# Altium PCB PCB.PcbDoc
Units mm, origin at the board's own origin, x right, y up, seen from the top; angles counter-clockwise.
Board outline 50.5 x 64 mm, 2 copper layers (Top Layer, Bottom Layer); 24 components, 29 nets, 116 pads, 69 vias.
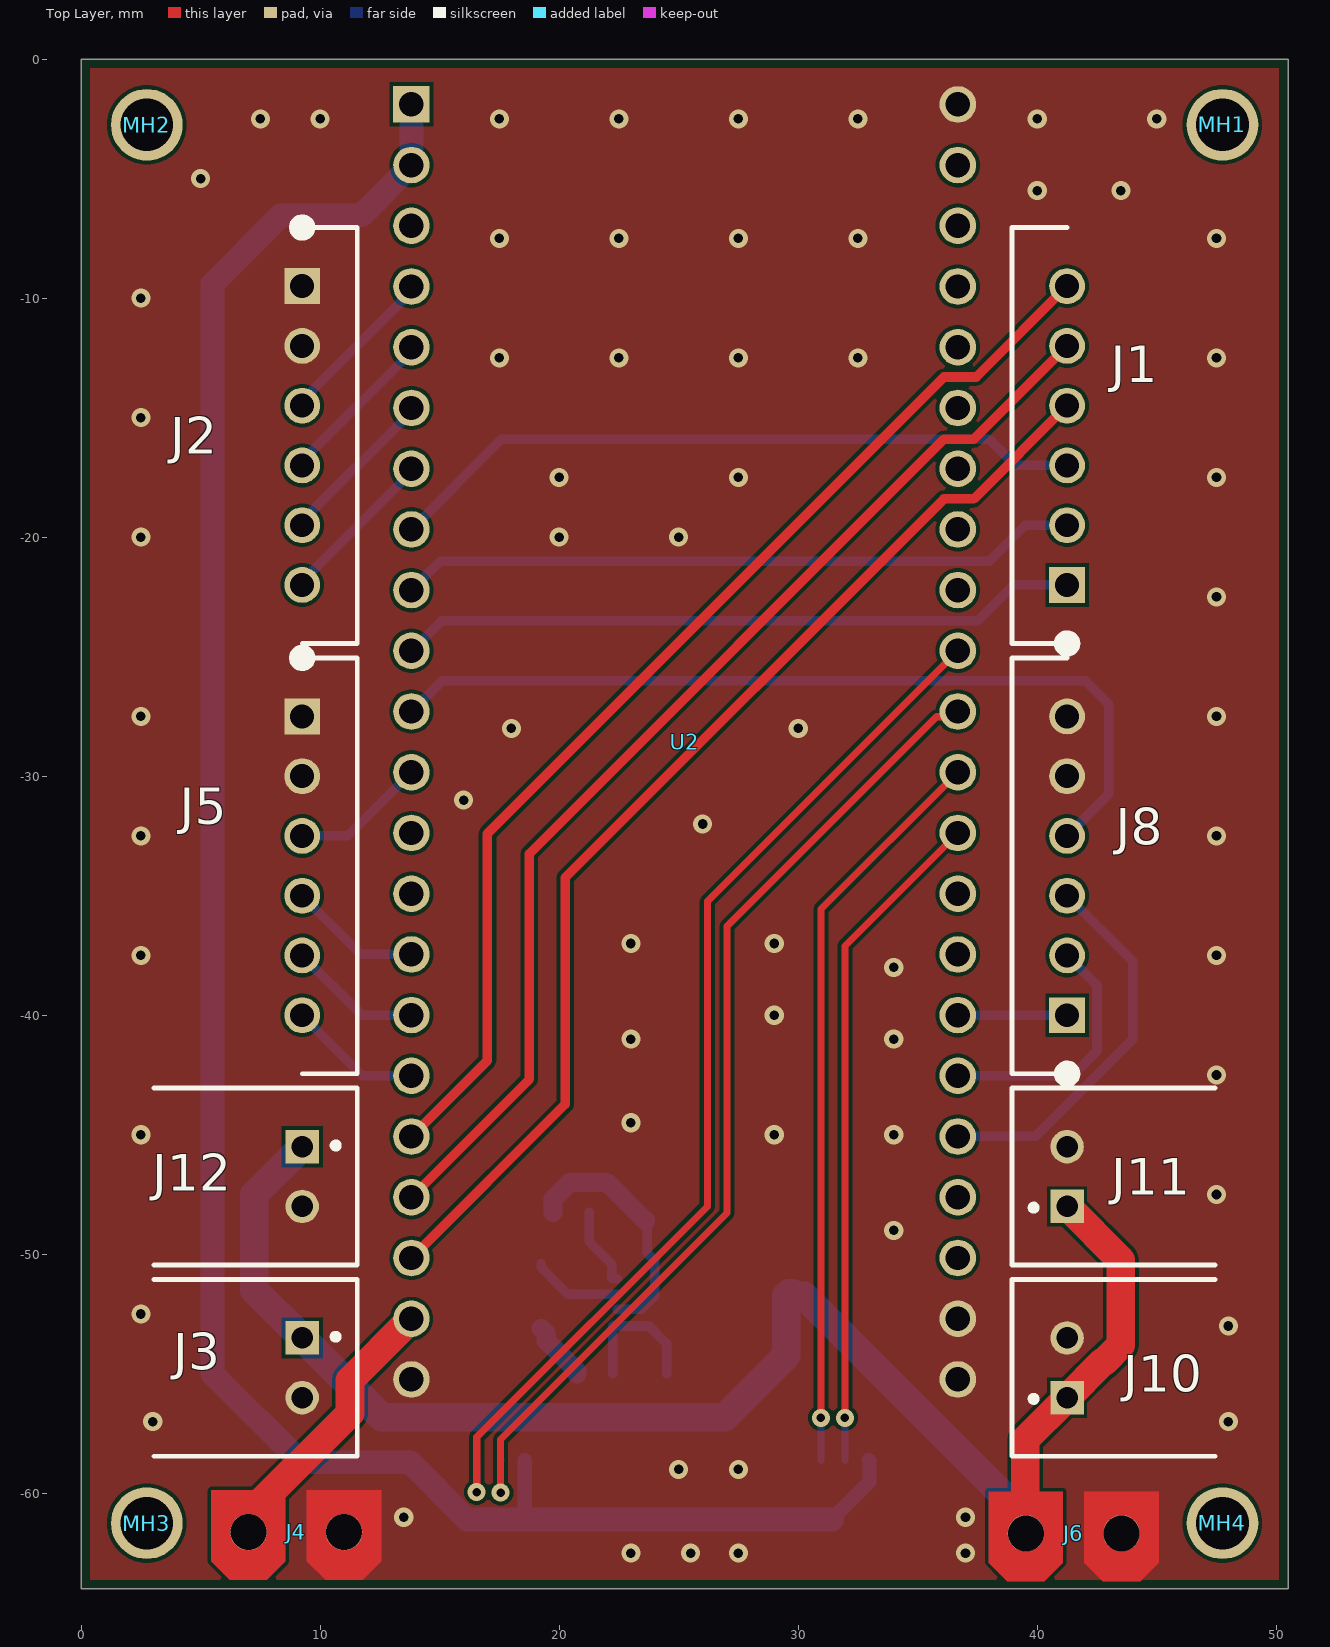
[diagram p0: Top Layer view]
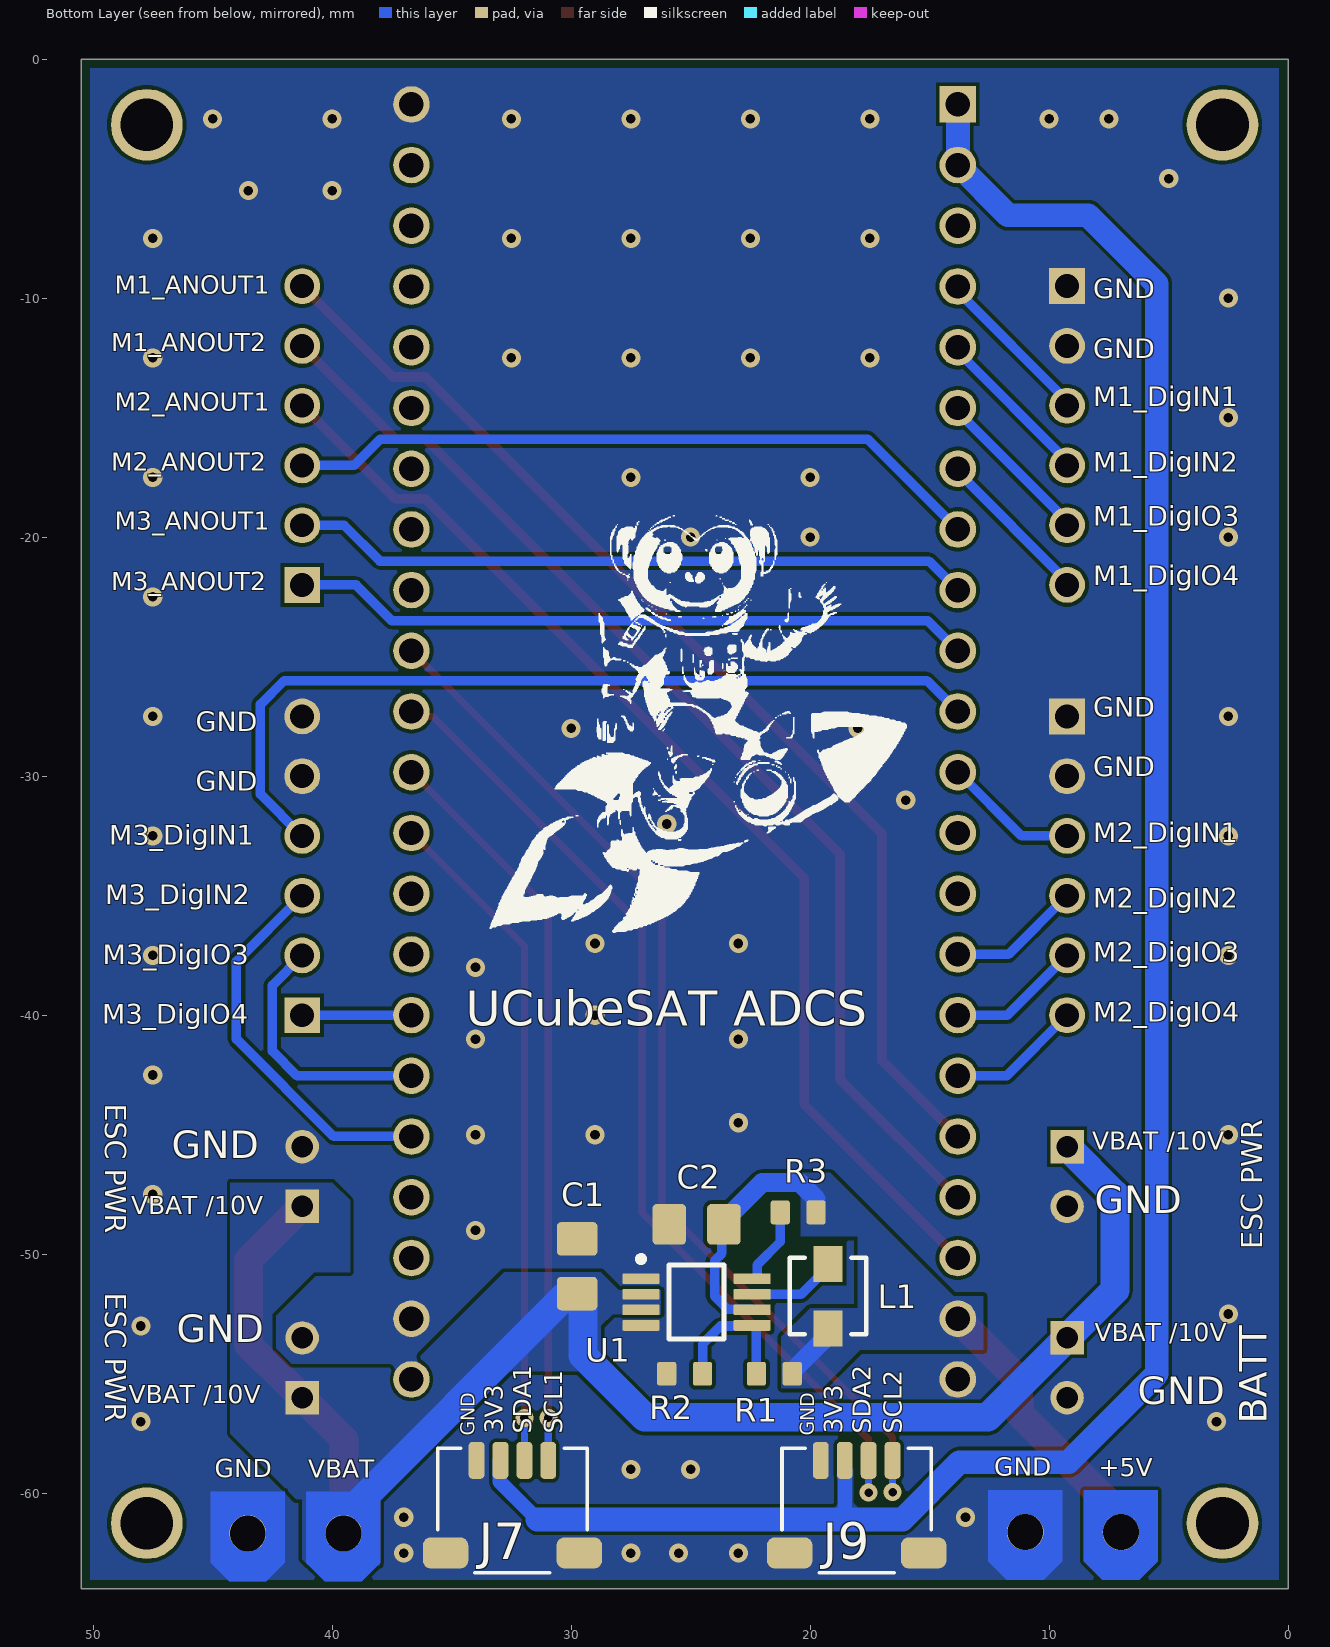
[diagram p1: Bottom Layer view, seen from below]
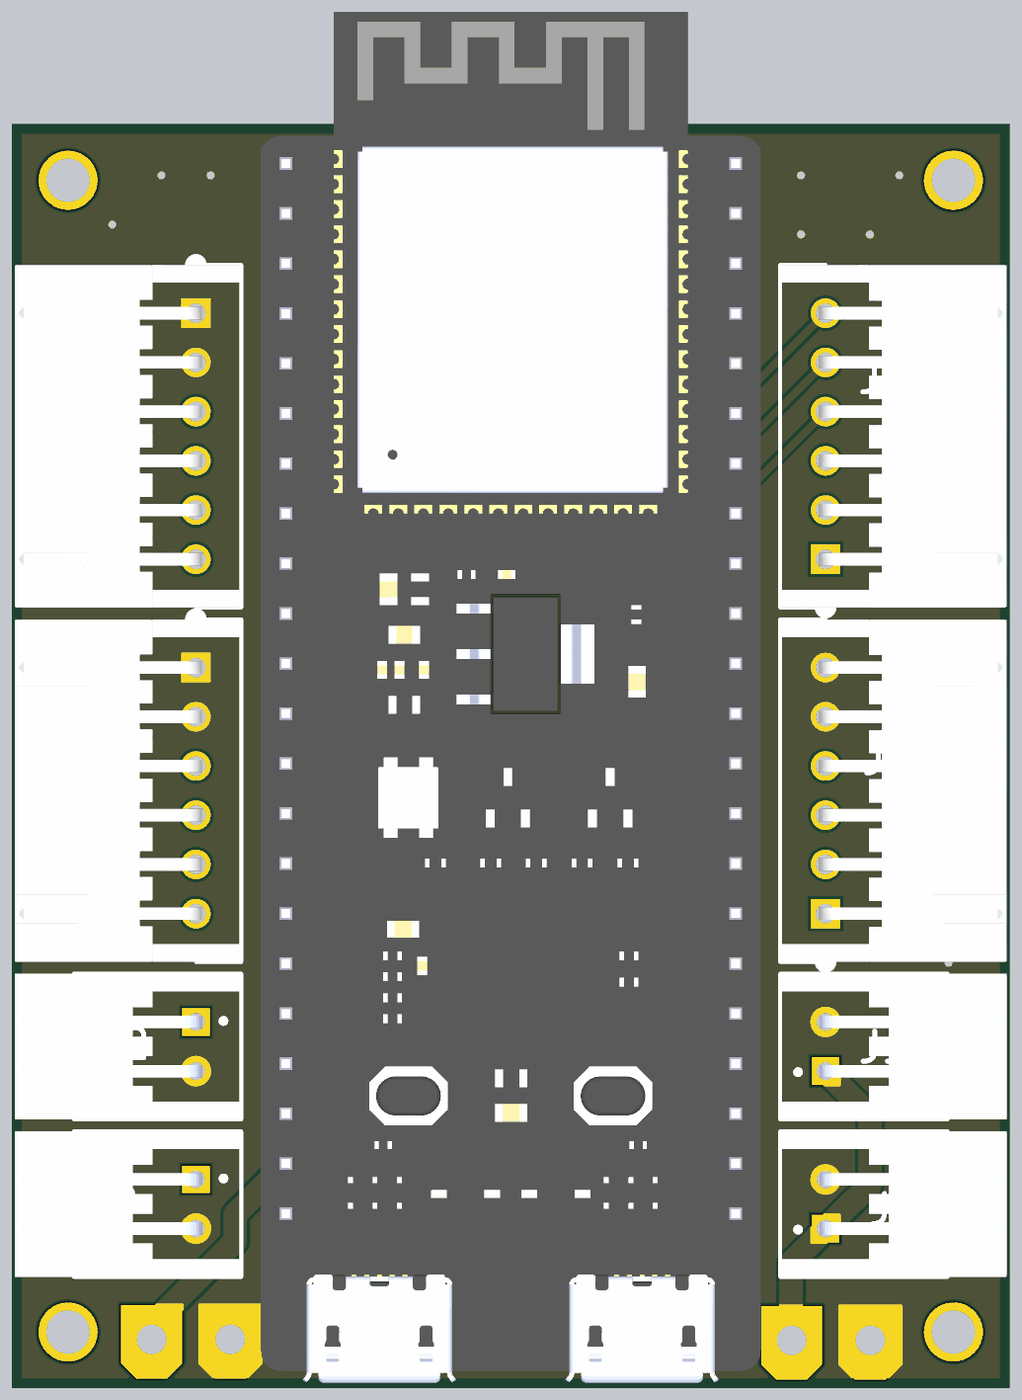
[diagram p2: 3D render of the assembled board from above, using the file's embedded part models]
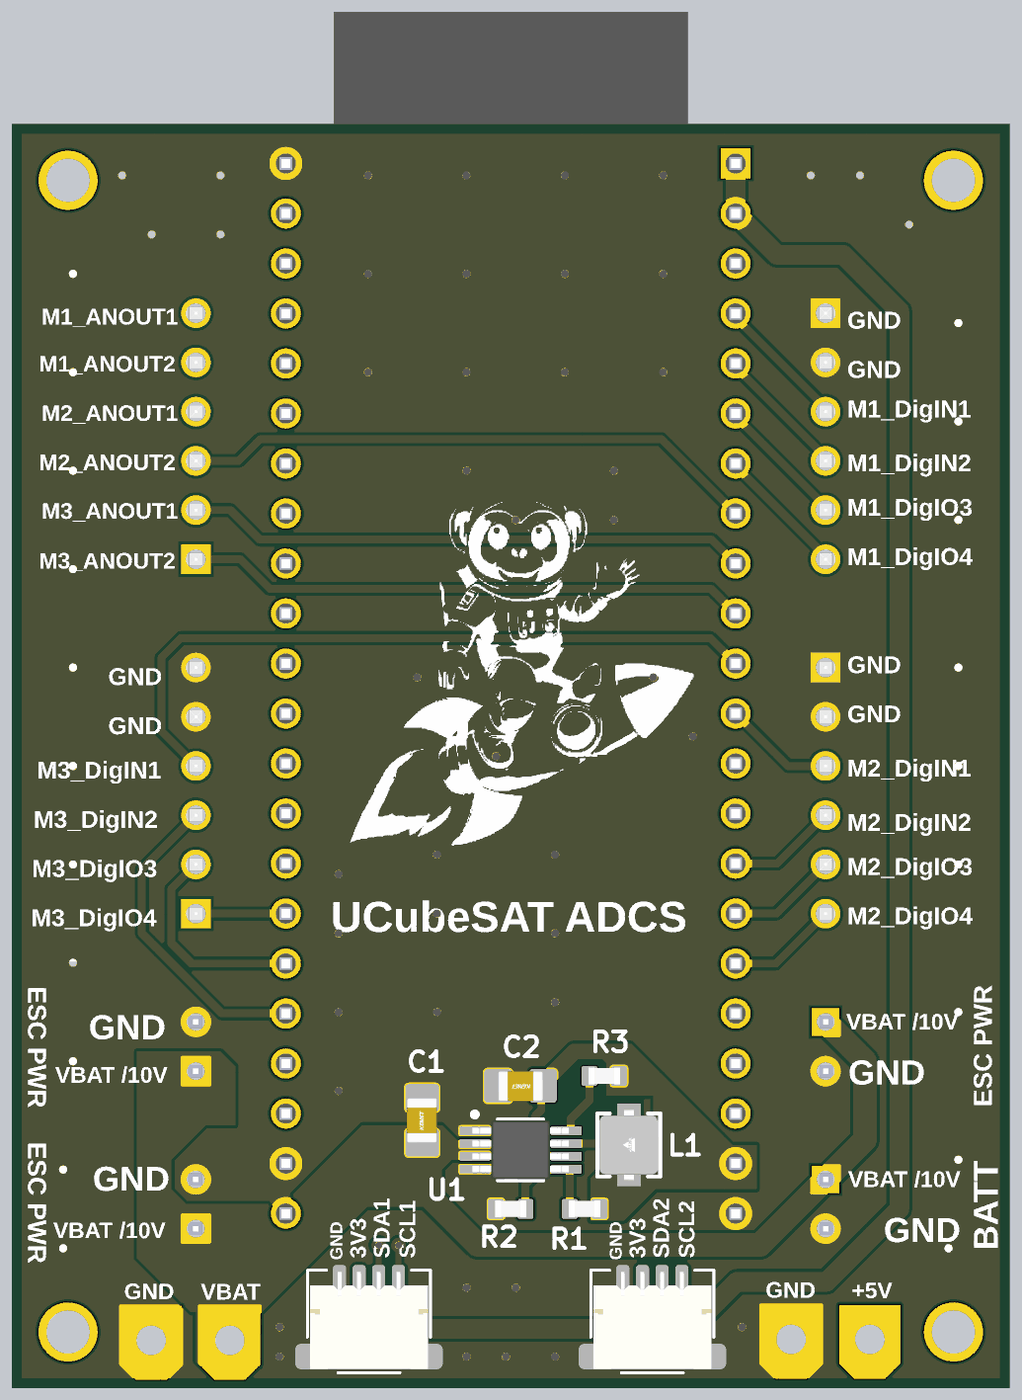
[diagram p3: 3D render of the assembled board from below, using the file's embedded part models]

## Layer stack, top to bottom
Top Solder: solder mask 0.0102, Solder Resist, Dk 3.5
Top Layer: signal copper 0.0356
Dielectric 1: dielectric 0.32, FR-4, Dk 4.8
Bottom Layer: signal copper 0.0356
Bottom Solder: solder mask 0.0102, Solder Resist, Dk 3.5

## Board outline
0,-64 0,0 50.5,0 50.5,-64

## Design rules (kind name [scope] priority, off if disabled: settings)
BoardOutlineClearance [All] p1: gap=0.381 ignorepadtopadclearanceinfootprint=FALSE
Clearance [All] p1: gap=0.152 ignorepadtopadclearanceinfootprint=FALSE
ComponentClearance [All] p1: gap=0.025 collisioncheckmode=3 verticalgap=0.025 showdistances=FALSE
DiffPairsRouting [All] p1: maxlimit=10 minlimit=0.152 mostfreqgap=0.203 toplayer_minwidth=0.152 toplayer_maxwidth=0.381 toplayer_prefwidth=0.203 bottomlayer_minwidth=0.152 bottomlayer_maxwidth=0.381 bottomlayer_prefwidth=0.203 maxuncoupledlength=12.7
HoleSize [All] p1: absolutevalues=TRUE maxlimit=6.731 minlimit=0.33 maxpercent=80.000 minpercent=20.000
HoleToHoleClearance [All] p1: gap=0.254 allowstackedmicrovias=FALSE
MinimumAnnularRing [All] p1: minimumring=0.178
MinimumSolderMaskSliver [All] p1: minsoldermaskwidth=0
PlaneClearance [All] p1: clearance=0.254
PlaneConnect [All] p1: planeconnectstyle=Direct reliefexpansion=0.406 reliefentries=4 reliefconductorwidth=0.152 reliefairgap=0.152
PolygonConnect [All] p1: connectstyle=Direct reliefconductorwidth=0.203 reliefentries=4 polygonreliefangle="90 Angle" airgapwidth=0.152
RoutingCorners [All] p1: cornerstyle=45-Degree minsetback=1.25 maxsetback=1.25
RoutingVias [All] p1: holewidth=0.381 width=0.762 viastyle="Through Hole" minholewidth=0.33 minwidth=0.686 maxholewidth=2.54 maxwidth=2.896
SilkToSilkClearance [All] p1: silktosilkclearance=0
SilkToSolderMaskClearance [IsPad] p1: minsilkscreentomaskgap=0.152 clearancetoexposedcopper=TRUE
SolderMaskExpansion [All] p1: expansion=0.075 istentingtop=FALSE
SupplyNets "Schematic Supply Nets_3" [InNet('+10V')] p1: voltage=0.000
SupplyNets "Schematic Supply Nets_2" [InNet('GND')] p2: voltage=0.000
SupplyNets "Schematic Supply Nets_1" [InNet('+5V')] p3: voltage=0.000
SupplyNets "Schematic Supply Nets" [InNet('+3V3')] p4: voltage=0.000
Width [All] p1: maxlimit=10.16 minlimit=0.152 preferedwidth=0.203
20 further rules are at their usual default settings.

## Components (designator, comment, footprint, x,y, rotation, side; value= is the part's Value field where it differs from the comment)
C1 "C2012X5R1E106K125AB" CAP_0805 29.75,-50.5 r90 bottom value=10uF
C2 "GRM21BR61E226ME44" CAP_0805 24.75,-48.75 r0 bottom value=22uF
J1 "S6B-XH-A (LF)(SN)" JST-XH-6PIN_RA 44.7,-15.75 r270 top locked
J2 "S6B-XH-A (LF)(SN)" JST-XH-6PIN_RA 5.8,-15.75 r90 top locked
J3 "S2B-XH-A" JST-S2B-XH-A(LF)(SN)_V 9.25,-54.75 r270 top locked
J4 "EXT_POWER_CONN" POWER 7,-61.625 r0 top
J5 "S6B-XH-A (LF)(SN)" JST-XH-6PIN_RA 5.8,-33.75 r90 top locked
J6 "EXT_POWER_CONN" POWER 39.525,-61.675 r0 top
J7 "SM04B-SRSS-TB" 4PIN_STEMMA 32.454,-60.719 r0 bottom locked
J8 "S6B-XH-A (LF)(SN)" JST-XH-6PIN_RA 44.7,-33.75 r270 top locked
J9 "SM04B-SRSS-TB" 4PIN_STEMMA 18.054,-60.719 r0 bottom locked
J10 "S2B-XH-A" JST-S2B-XH-A(LF)(SN)_V 41.25,-54.75 r90 top locked
J11 "S2B-XH-A" JST-S2B-XH-A(LF)(SN)_V 41.25,-46.75 r90 top locked
J12 "S2B-XH-A" JST-S2B-XH-A(LF)(SN)_V 9.25,-46.75 r270 top locked
L1 "IHLP1212BZEZ2R2M1Z" IND_1212 19.25,-51.75 r270 bottom
MH1 "MH" M2_MTH 47.75,-2.75 r0 top
MH2 "MH" M2_MTH 2.75,-2.75 r0 top locked
MH3 "MH" M2_MTH 2.75,-61.25 r0 top
MH4 "MH" M2_MTH 47.75,-61.25 r0 top
R1 "RES_0603" RES_0603 21.5,-55 r180 bottom
R2 "RES_0603" RES_0603 25.25,-55 r180 bottom
R3 "100k" RES_0603 20.5,-48.25 r180 bottom
U1 "TPS62160DGKR" DGK0008A_M 24.75,-52 r180 bottom
U2 "ESP32-S3-DEVKITC-1-N8R2" XCVR_ESP32-S3-DEVKITC-1-N8R2 25.25,-31.865 r0 top locked

## Footprints (in the part's own frame and the unit in brackets; to place one, negate y for a bottom-side part, rotate by r counter-clockwise, add the part's x,y. Pads: shape width x height; smd on the part's side, far side on the other; paste and mask are expansions set on the pad)
4PIN_STEMMA [mil]
  rrect50% 26x61 smd paste+0 mask+0: 1(59.06,-82.62) 2(19.68,-82.62) 3(-19.68,-82.62) 4(-59.06,-82.62)
  rrect50% 75x51 smd paste+0 mask+0: 5(-110.24,69.94) 6(110.24,69.94)
  silkscreen extent -123,-102 123,102, body extent -118,-100 118,95, height 117
CAP_0805 [mm]
  rrect25% 1.4x1.7 smd: 1(-1.143,0) 2(1.143,0)
  body extent -1.15,-0.76 1.15,0.79, height 1.01
DGK0008A_M [mm] "TSOP, 8-Leads, Body 3.1x3.1mm, Pitch 0.65mm, IPC Low Density"
  rrect22% 1.55x0.45 smd mask+0.06: 1(-2.325,0.975) 2(-2.325,0.325) 3(-2.325,-0.325) 4(-2.325,-0.975) 5(2.325,-0.975) 6(2.325,-0.325) 7(2.325,0.325) 8(2.325,0.975)
  silkscreen extent -2.45,-1.55 1.15,1.92, body extent -2.45,-1.5 2.45,1.5, height 0.94
IND_1212 [mm]
  rect 1.5x1.2 smd paste+0 mask+0: 1(-1.35,0) 2(1.35,0)
  silkscreen extent -1.6,-1.6 1.6,1.6, body extent -1.83,-1.5 1.83,1.5, height 2
JST-S2B-XH-A(LF)(SN)_V [mm] "Header, 2-Leads, Body 7.4x11.5mm, Pitch 2.5mm"
  rect 1.4x1.4 hole 0.9: 1(-1.25,0)
  round 1.4 hole 0.9: 2(1.25,0)
  silkscreen extent -3.7,-6.19 3.7,2.3, body extent -3.7,-9.21 3.7,2.29, height 5.71
JST-XH-6PIN_RA [mm]
  rect 1.5x1.5 hole 1 paste-2539.97 mask+0: 1(6.25,-3.45)
  round 1.5 hole 1 paste-2539.97 mask+0: 2(3.75,-3.45) 3(1.25,-3.45) 4(-1.25,-3.45) 5(-3.75,-3.45) 6(-6.25,-3.45)
  silkscreen extent -8.7,-5.75 9,-3.15, body extent -8.8,-5.85 8.8,5.85, height 0.25
M2_MTH [mm]
  round 3 hole 2.2 paste-2539.97: 1(0,0)
POWER [mm]
  round 1.525 hole 1.5 paste-2539.97: 1(0,0) 2(4,0)
  Top Layer region: -1.55,-1.225 -0.775,-2 0.775,-2 1.55,-1.225 1.55,1.75 -1.55,1.75
  Top Layer region: 2.45,-1.225 3.225,-2 4.775,-2 5.55,-1.225 5.55,1.75 2.45,1.75
  Bottom Layer region: -1.55,-1.225 -0.775,-2 0.775,-2 1.55,-1.225 1.55,1.75 -1.55,1.75
  Bottom Layer region: 2.45,-1.225 3.225,-2 4.775,-2 5.55,-1.225 5.55,1.75 2.45,1.75
RES_0603 [mm]
  rrect25% 0.8x1 smd: 1(-0.75,0) 2(0.75,0)
  body extent -0.8,-0.43 0.8,0.43, height 0.52
XCVR_ESP32-S3-DEVKITC-1-N8R2 [mm]
  rect 1.53x1.53 / inner round 1.53 / far side rect 1.53x1.53 hole 1.02: J1_1(-11.43,29.97)
  round 1.53 hole 1.02: J1_2(-11.43,27.43) J1_3(-11.43,24.89) J1_4(-11.43,22.35) J1_5(-11.43,19.81) J1_6(-11.43,17.27) J1_7(-11.43,14.73) J1_8(-11.43,12.19) J1_9(-11.43,9.65) J1_10(-11.43,7.11) J1_11(-11.43,4.57) J1_12(-11.43,2.03) J1_13(-11.43,-0.51) J1_14(-11.43,-3.05) J1_15(-11.43,-5.59) J1_16(-11.43,-8.13) J1_17(-11.43,-10.67) J1_18(-11.43,-13.21) J1_19(-11.43,-15.75) J1_20(-11.43,-18.29) J1_21(-11.43,-20.83) J1_22(-11.43,-23.37) J3_1(11.43,29.97) J3_2(11.43,27.43) J3_3(11.43,24.89) J3_4(11.43,22.35) J3_5(11.43,19.81) J3_6(11.43,17.27) J3_7(11.43,14.73) J3_8(11.43,12.19) J3_9(11.43,9.65) J3_10(11.43,7.11) J3_11(11.43,4.57) J3_12(11.43,2.03) J3_13(11.43,-0.51) J3_14(11.43,-3.05) J3_15(11.43,-5.59) J3_16(11.43,-8.13) J3_17(11.43,-10.67) J3_18(11.43,-13.21) J3_19(11.43,-15.75) J3_20(11.43,-18.29) J3_21(11.43,-20.83) J3_22(11.43,-23.37)
  body extent -12.7,-31.96 12.7,37.68, height 7.39

## Part data
C1: "CAP, CERM, 10uF, 25V, +/-10%, X5R, 0805", Cap_Case=0805, Manufacturer=TDK, Supplier Part Number 1=445-5984-1-ND, TempCo=X5R, Tolerance_%=10, Value1=Unknown, Value2=25V, ValueDisplayed=10µF, Cap_F=0.00001, ComponentLink1Description="Datasheet link", ComponentLink1URL=http://www.tdk.com/pdf/TDKMLCCCapRange.pdf, CompType=Capacitor, LatestRevisionDate=2014-06-25, MountType=SMT, PackageReference=0805, PartNumber=C2012X5R1E106K125AB, Polarized=N, Published=2008-06-19, Publisher="Texas Instruments", RoHS=Y, Supplier 1=Digi-Key, SymbolVersion=2008-07-09, TaMax_C=85, TaMin_C=-55, Technology=Ceramic, U/M=EA, VDC_V=25
C2: "CAP, CERM, 22 µF, 25 V, +/- 20%, X5R, 0805", Cap_Case=0805, Manufacturer=MuRata, Supplier Part Number 1=490-14661-1-ND, TempCo=X5R, Tolerance_%=20, ValueDisplayed=22µF, CompType=Capacitor, MountType=SMT, PackageReference=0805, PartNumber=GRM21BR61E226ME44, Supplier 1=DigiKey, TaMax_C=85
J1 J2 J5 J8: "CONN HEADER THT R/A 6POS 2.5MM", Color=Natural, Contact Resistance=20mR, Current Rating=3A, Flammability Rating="UL94 V-0", Housing Color=White, Insulation Resistance=1GR, Max Operating Temperature=85°C, Max Voltage Rating (AC)=250V, Min Operating Temperature=-25°C, Package Quantity=500, Connector Type=Header, Contact Finish - Mating=TIN, Contact Material=Brass, Contact Plating=Tin, Contact Shape=Square, Contact Type="Male Pin", Depth=11.5mm, Fastening Type=Detent, Gender=Male, Housing Material=Polyamide, Insulation Color=Natural, Insulation Material=Nylon, Lead Free="Lead Free", Lead Pitch=2.5mm, Length=17.4mm, Max Current Rating=3A, Mount="Through Hole", Number of Contacts=6, Number of Positions=6, Number of Rows=1, Orientation="Right Angle", Packaging=Bulk, Pitch=2.5mm, REACH SVHC="No SVHC", Series=XH, Termination=Solder, Voltage Rating=250V, Voltage Rating (AC)=250V, Wire/Cable Gauge=22AWG
MH1 MH2 MH3 MH4: library part M2_MTH
R1: Supplier Part Number 1=2019-RN73H1JTTD9423D25CT-ND, R=942k, Supplier 1=DigiKey
R2: Supplier Part Number 1=RC0603FR-07180KL, R=180k, Supplier 1=Avnet
R3: library part RES_0603, Supplier Part Number 1=311-100KHRTR-ND, Supplier 1=DigiKey
U1: "Buck Step Down Regulator with 3 to 17 V Input and 0.9 to 6 V Output, -40 to 85 degC, 8-Pin VSSOP (DGK), Green (RoHS & no Sb/Br)", Manufacturer="Texas Instruments", Rating=Catalog, Switch Current Limit(Typ)(A)=1.8, Code_JEDEC=MO-187-AA, ComponentLink1Description=Datasheet, ComponentLink1URL=http://www.ti.com/general/docs/lit/getliterature.tsp?genericPartNumber=TPS62160&fileType=pdf, ComponentLink2Description="Package Specification", ComponentLink2URL=http://www.ti.com/lit/ml/mpds028d/mpds028d.pdf, ComponentLink3Description="URL Link1", ComponentLink3URL="Samples URL:http://www.ti.com/product/tps62160#samples", DatasheetVersion=SLVSAM2A, Duty Cycle(Max)(%)=100, Eco-Plan="Green (RoHS & no Sb/Br)", Iout(Max)(A)=1, Iq(Typ)(mA)=0.017, Mounting Technology="Surface Mount", PackageDescription="8-Pin Thin Small Outline Package 3 x 3 mm Body ,0.65 mm Pitch", PackageReference=DGK0008A, PackageVersion="revE, May-2006", PartNumber=TPS62160DGKR, Regulated Outputs(#)=1, SubFamily="Step-Down Regulator", Synchronous Rectification=TRUE, Topology=Buck, Vin(Max)(V)=17, Vin(Min)(V)=3, Vout(Max)(V)=6, Vout(Min)(V)=0.9
U2: "WiFi Development Tools - 802.11 (Engineering Samples Only) ESP32-S3 General-Purpose Development Board, ESP32-S3-WROOM-1-N8R2, with Pin Header", Package=None, Check_prices=https://www.snapeda.com/parts/ESP32-S3-DEVKITC-1-N8R2/Espressif+Systems/view-part/?ref=eda, MF="Espressif Systems", MP=ESP32-S3-DEVKITC-1-N8R2, SnapEDA_Link=https://www.snapeda.com/parts/ESP32-S3-DEVKITC-1-N8R2/Espressif+Systems/view-part/?ref=snap

## Via types
v1: diameter 0.8, hole 0.4, Top Layer to Bottom Layer, tented both sides, 65 vias
v2: diameter 0.75, hole 0.356, Top Layer to Bottom Layer, tented both sides, 4 vias

## Nets (pads, with @x,y where several pads share a name; then routed paths per layer and width w, separated by ;. In a path a pad name is that pad's centre, name@x,y a point inside that pad or via, vN(x,y) a via of type N, cw(c..) or ccw(c..) an arc to the next point about the centre after c; other vN are vias at no path point)
+3V3: J7.2 J9.2 U2.J1_1 U2.J1_2 | length 92.6
  Bottom Layer w0.6: 18.5,-61.088 18.554,-61.034 J9.2 ; 31.412,-61.088 32.984,-59.516 32.984,-58.651 J7.2
  Bottom Layer w1: U2.J1_1 U2.J1_2 11.722,-6.533 8.367,-6.533 5.5,-9.4 5.5,-55 9.2,-58.7 13.753,-58.7 16.142,-61.088 18.5,-61.088 31.412,-61.088
+5V: C2.1 J4.1 L1.2 R1.2 R3.2 U1.6 U2.J1_21 | length 24.8
  Top Layer w1.2: J4.1 7,-60.9 11.25,-56.65 11.25,-55.265 U2.J1_21
  Bottom Layer w0.4: U1.6 22.45,-52.3 23.45,-52.3 24,-51.75 24,-50.272 23.694,-49.966 23.694,-48.687 C2.1@23.607,-48.6
  Bottom Layer w0.8: L1.2 19.45,-53.3 19.45,-53.6 20.75,-54.9 R1.2 ; R3.2 19.75,-47.692 20.442,-47 22.007,-47 C2.1@23.607,-48.6
+10V: C1.1 J3.1 J6.1 J10.1 J11.1 J12.1 U1.2 U1.3 | length 65.8
  Top Layer w1.2: J6.1 39.5,-61.65 39.5,-57.75 J10.1 42.75,-54.5 42.797,-54.5 43.5,-53.797 43.5,-50.25 J11.1
  Bottom Layer w1.2: J12.1 7.25,-47.5 7.25,-51.5 J3.1 12.575,-56.825 26.925,-56.825 29.5,-54.25 29.5,-51.743 29.6,-51.643 C1.1 29.85,-51.743 30.243,-51.743 39.5,-61 39.5,-61.65 J6.1
FB: R1.1 R2.2 U1.5 | length 5.8
  Bottom Layer w0.4: R1.1 22.25,-53 22.275,-52.975 U1.5 22.45,-53 23.75,-53 24.5,-53.75 R2.2
GND: C1.2 C2.2 J2.1 J2.2 J3.2 J4.2 J5.1 J5.2 J6.2 J7.1 J7.5 J7.6 J8.5 J8.6 J9.1 J9.5 J9.6 J10.2 J11.2 J12.2 R2.1 U1.1 U1.4 U2.J1_22 U2.J3_1 U2.J3_21 U2.J3_22
  other v1: 23,-62.5 25.5,-62.5 27.5,-62.5 37,-62.5 13.5,-61 37,-61 25,-59 27.5,-59 3,-57 48,-57 48,-53 2.5,-52.5 34,-49 47.5,-47.5 2.5,-45 29,-45 34,-45 23,-44.5 47.5,-42.5 23,-41 34,-41 29,-40 34,-38 2.5,-37.5 47.5,-37.5 23,-37 29,-37 2.5,-32.5 47.5,-32.5 26,-32 16,-31 18,-28 30,-28 2.5,-27.5 47.5,-27.5 47.5,-22.5 2.5,-20 20,-20 25,-20 20,-17.5 27.5,-17.5 47.5,-17.5 2.5,-15 17.5,-12.5 22.5,-12.5 27.5,-12.5 32.5,-12.5 47.5,-12.5 2.5,-10 17.5,-7.5 22.5,-7.5 27.5,-7.5 32.5,-7.5 47.5,-7.5 40,-5.5 43.5,-5.5 5,-5 7.5,-2.5 10,-2.5 17.5,-2.5 22.5,-2.5 27.5,-2.5 32.5,-2.5 40,-2.5 45,-2.5
M1_ANOUT1: J1.6 U2.J1_18 | length 47.7
  Top Layer w0.4: U2.J1_18 17,-41.895 17,-32.4 36.1,-13.3 37.45,-13.3 J1.6
M1_ANOUT2: J1.5 U2.J1_19 | length 47.7
  Top Layer w0.4: U2.J1_19 18.75,-42.685 18.75,-33.25 36.1,-15.9 37.35,-15.9 J1.5
M1_DigIN1: J2.3 U2.J1_4 | length 6.9
  Bottom Layer w0.4: J2.3 9.25,-14.292 13.82,-9.722 U2.J1_4
M1_DigIN2: J2.4 U2.J1_5 | length 6.8
  Bottom Layer w0.4: J2.4 9.25,-16.813 13.82,-12.243 U2.J1_5
M1_DigIO3: J2.5 U2.J1_6 | length 6.8
  Bottom Layer w0.4: J2.5 9.25,-19.332 13.82,-14.762 U2.J1_6
M1_DigIO4: J2.6 U2.J1_7 | length 6.8
  Bottom Layer w0.4: J2.6 9.25,-21.852 13.82,-17.282 U2.J1_7
M2_ANOUT1: J1.4 U2.J1_20 | length 47.7
  Top Layer w0.4: U2.J1_20 20.25,-43.725 20.25,-34.25 36.1,-18.4 37.35,-18.4 J1.4
M2_ANOUT2: J1.3 U2.J1_8 | length 29.4
  Bottom Layer w0.4: U2.J1_8 17.595,-15.9 37.982,-15.9 39.082,-17 J1.3
M2_DigIN1: J5.3 U2.J1_12 | length 5.7
  Bottom Layer w0.4: J5.3 11.155,-32.5 U2.J1_12
M2_DigIN2: J5.4 U2.J1_15 | length 5.6
  Bottom Layer w0.4: J5.4 11.705,-37.455 U2.J1_15
M2_DigIO3: J5.5 U2.J1_16 | length 5.6
  Bottom Layer w0.4: J5.5 11.745,-39.995 U2.J1_16
M2_DigIO4: J5.6 U2.J1_17 | length 5.6
  Bottom Layer w0.4: J5.6 11.785,-42.535 U2.J1_17
M3_ANOUT1: J1.2 U2.J1_9 | length 28.6
  Bottom Layer w0.4: U2.J1_9 15.035,-21 38,-21 39.5,-19.5 J1.2
M3_ANOUT2: J1.1 U2.J1_10 | length 28.6
  Bottom Layer w0.4: U2.J1_10 15.075,-23.5 37.5,-23.5 39,-22 J1.1
M3_DigIN1: J8.4 U2.J1_11 | length 36.4
  Bottom Layer w0.4: U2.J1_11 15.115,-26 42,-26 43,-27 43,-30.75 J8.4
M3_DigIN2: J8.3 U2.J3_18 | length 16.1
  Bottom Layer w0.4: U2.J3_18 36.688,-45.067 39.933,-45.067 44,-41 44,-37.75 J8.3
M3_DigIO3: J8.2 U2.J3_17 | length 10.8
  Bottom Layer w0.4: U2.J3_17 41.465,-42.535 42.5,-41.5 42.5,-38.75 J8.2
M3_DigIO4: J8.1 U2.J3_16 | length 4.6
  Bottom Layer w0.4: U2.J3_16 41.245,-39.995 J8.1
PG: R3.1 U1.8 | length 3.4
  Bottom Layer w0.4: R3.1 21.25,-49.475 22.209,-50.434 22.209,-51 22.234,-51.025 U1.8
SCL_1: J7.4 U2.J3_12 | length 31.2
  Top Layer w0.3: v2(30.954,-56.846) 30.954,-35.561 U2.J3_12
  Bottom Layer w0.3: J7.4 v2(30.954,-56.846)
SCL_2: J9.4 U2.J3_10 | length 44.9
  Top Layer w0.3: v2(16.55,-59.95) 16.55,-57.65 26.2,-48 26.2,-35.235 U2.J3_10
  Bottom Layer w0.3: v2(16.55,-59.95) 16.552,-59.948 J9.4 J9.4
SDA_1: J7.3 U2.J3_13 | length 28.2
  Top Layer w0.3: v2(31.954,-56.846) 31.954,-37.101 U2.J3_13
  Bottom Layer w0.3: J7.3 v2(31.954,-56.846)
SDA_2: J9.3 U2.J3_11 | length 42.4
  Top Layer w0.3: v2(17.55,-59.975) 17.55,-57.75 27.02,-48.28 27.02,-36.28 35.783,-27.517 36.458,-27.517 U2.J3_11
  Bottom Layer w0.3: v2(17.55,-59.975) 17.552,-59.973 17.552,-58.623 J9.3
SW: L1.1 U1.7 | length 3.8
  Bottom Layer w0.4: L1.1 19.25,-50.55 20.375,-51.675 U1.7
pads on no net: MH1.1 MH2.1 MH3.1 MH4.1 U2.J1_3 U2.J1_13 U2.J1_14 U2.J3_2 U2.J3_3 U2.J3_4 U2.J3_5 U2.J3_6 U2.J3_7 U2.J3_8 U2.J3_9 U2.J3_14 U2.J3_15 U2.J3_19 U2.J3_20

## Polygon pours and split planes (outlines as drawn)
GND on Bottom Layer "GND_L02_P003" (solid, remove dead copper, pour order 3): 50.5,0 0,0 0,-64 50.5,-64
+10V on Bottom Layer "+10V_L02_P000" (solid, pour order 0): 32.8,-54.9 38,-60.1 38,-63 41,-63 41.25,-62.75 41.25,-60.25 41.5,-60.25 44.25,-57.5 44.25,-47 40,-47 39.25,-47.75 39.25,-50.75 40.75,-50.75 42.5,-52.5 42.5,-54 41.75,-54.75 38.5,-54.75 36.8,-54.75 32.8,-50.75 28.75,-50.75 28,-51.5 26.25,-51.5 26.25,-52.5 28.25,-52.5 28.75,-53 28.75,-54.9
+3V3 on Bottom Layer "+3V3_L02_P006" (solid, pour order 6): 18.628,-58.972 20.4,-60.744 20.4,-61.1 17.7,-61.1 17.6,-61 18.2,-60.4 18.2,-58.972
+5V on Bottom Layer "+5V_L02_P001" (solid, pour order 1): 17.9,-54 19.5,-55.6 21.2,-55.6 21.2,-53.45 20,-52.25 18,-52.25 18,-49.25 20.4,-49.25 20.4,-46.6 19.15,-46.6 14,-51.75 12.75,-51.75 12.75,-54
GND on Top Layer "GND_L01_P005" (solid, remove dead copper, pour order 5): 50.5,0 0,0 0,-64 50.5,-64

## Silkscreen, mask and mechanical layers (free items; w line width, h text height)
Bottom Overlay:
  drawing of 195 lines, arcs and shapes, not listed
  text "M1_ANOUT1" at 49.097,-10.071 h1.3
  text "GND" at 8.15,-10.283 h1.4
  text "M1_ANOUT2" at 49.228,-12.471 h1.3
  text "GND" at 8.15,-12.783 h1.4
  text "M1_DigIN1" at 8.15,-14.786 h1.4
  text "M2_ANOUT1" at 49.097,-14.971 h1.3
  text "M2_ANOUT2" at 49.228,-17.471 h1.3
  text "M1_DigIN2" at 8.15,-17.536 h1.4
  text "M1_DigIO3" at 8.15,-19.786 h1.4
  text "M3_ANOUT1" at 49.097,-19.942 h1.3
  text "M1_DigIO4" at 8.15,-22.286 h1.4
  text "M3_ANOUT2" at 49.228,-22.471 h1.3
  text "GND" at 8.15,-27.783 h1.4
  text "GND" at 45.712,-28.383 h1.4
  text "GND" at 8.15,-30.283 h1.4
  text "GND" at 45.712,-30.883 h1.4
  text "M2_DigIN1" at 8.15,-33.036 h1.4
  text "M3_DigIN1" at 49.326,-33.136 h1.4
  text "M3_DigIN2" at 49.498,-35.636 h1.4
  text "M2_DigIN2" at 8.15,-35.786 h1.4
  text "M2_DigIO3" at 8.15,-38.036 h1.4
  text "M3_DigIO3" at 49.594,-38.136 h1.4
  text "M2_DigIO4" at 8.15,-40.536 h1.4
  text "M3_DigIO4" at 49.625,-40.636 h1.4
  text "UCubeSAT ADCS" at 34.4,-40.92 h2.5
  text "ESC PWR" at 49.782,-43.7 h1.5 r90
  text "VBAT /10V" at 8.2,-45.884 h1.3
  text "GND" at 46.7,-46.376 h2
  text "VBAT /10V" at 48.4,-48.584 h1.3
  text "GND" at 8.1,-48.676 h2
  text "ESC PWR" at 0.804,-49.8 h1.5 r270
  text "ESC PWR" at 49.782,-51.6 h1.5 r90
  text "VBAT /10V" at 8.1,-53.884 h1.3
  text "GND" at 46.5,-54.076 h2
  text "VBAT /10V" at 48.5,-56.484 h1.3
  text "GND" at 6.3,-56.676 h2
  text "BATT" at 0.5,-57.1 h2 r270
  text "SCL2" at 15.916,-57.5 h1.3 r270
  text "SDA2" at 17.216,-57.5 h1.3 r270
  text "3V3" at 18.416,-57.5 h1.3 r270
  text "SCL1" at 30.116,-57.5 h1.3 r270
  text "SDA1" at 31.416,-57.5 h1.3 r270
  text "3V3" at 32.616,-57.5 h1.3 r270
  text "GND" at 19.612,-57.6 h1 r270
  text "GND" at 33.812,-57.6 h1 r270
  text "GND" at 12.3,-59.509 h1.3
  text "+5V" at 7.925,-59.534 h1.3
  text "GND" at 44.9,-59.584 h1.3
  text "VBAT" at 41,-59.6 h1.3
Board Shape:
  the board outline again, w0.2